# EAGLE board drvelocity (EAGLE 7.5.0)
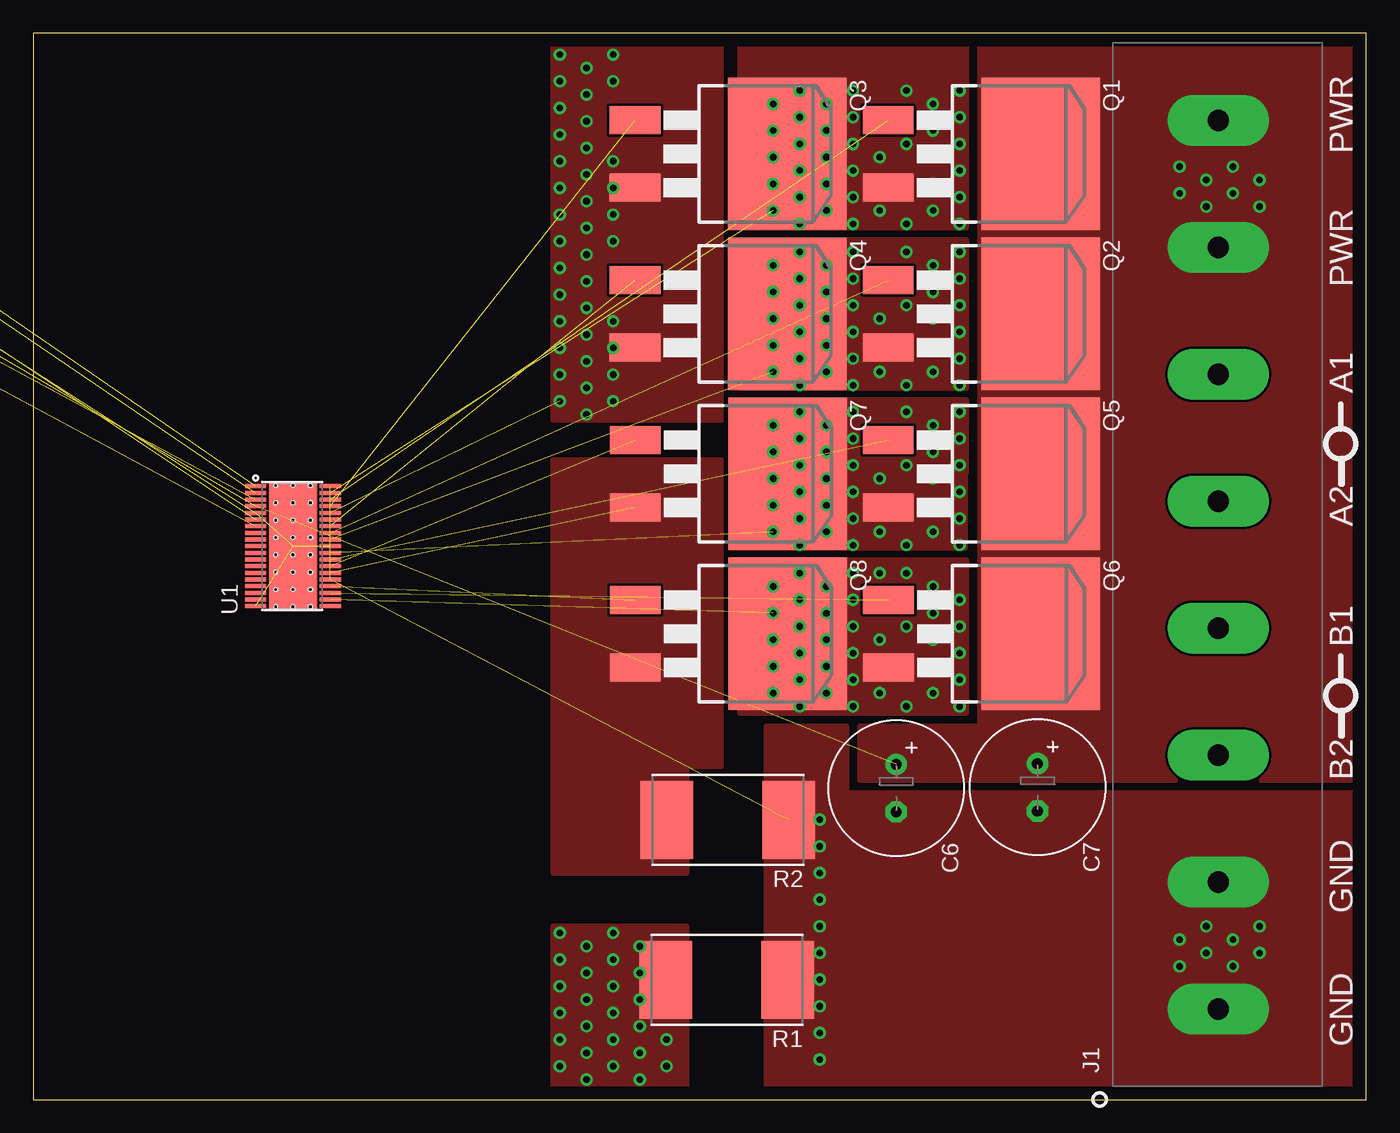
[diagram p0: board, top side]
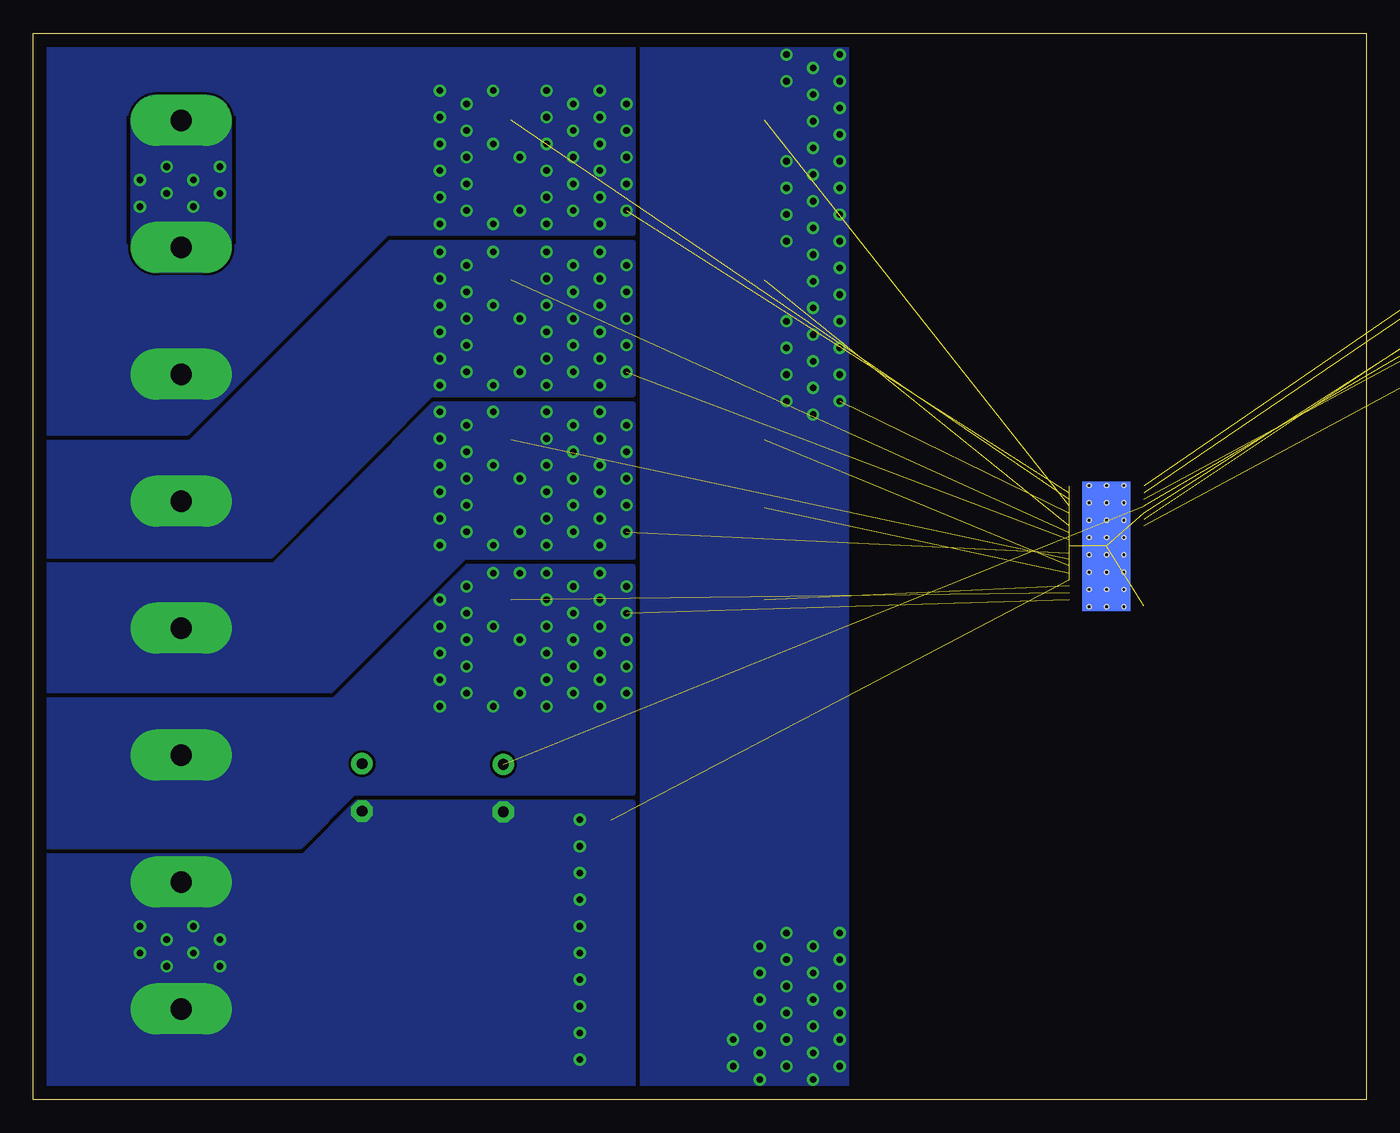
[diagram p1: board, bottom side, seen from below]

Size 100 x 80 mm. Coordinates in mm from the lower left corner, seen from the top.
Outline: 0,0 100,0 100,80 0,80 0,0
Copper layers (1*16): Top 0.035mm / dielectric 1.5mm / Bottom 0.035mm
Design rules "default *": minimum track width 10mil, minimum drill 0.5mm, track to track 8mil, track to pad 8mil, pad to pad 8mil, via to via 8mil, smd to smd 8mil, copper to edge 40mil, drill to drill 40mil, minimum pad ring 10mil, minimum via ring 8mil, stop-mask expansion 4mil, vias tented up to drill 0mil, thermal gap 10mil

## Footprints (pad centres in the part's own frame; a part is rotated, then mirrored left to right if it is on the bottom)
C0402 = smd 0.7 x 0.9: 1 -0.65,0; 2 0.65,0
E3,5-10 = drill 0.813 pad 1.6: + -1.778,0 | drill 0.813 pad 1.6 octagon: - 1.778,0
MOLEX_BARRIER_8 = drill 1.6 pad 3.81 long: 1 7.9,5.8; 2 7.9,15.325; 3 7.9,24.85; 4 7.9,34.375; 5 7.9,43.9; 6 7.9,53.425; 7 7.9,62.95; 8 7.9,72.475
D2PACK = smd 2.083 x 3.81: 1 -2.54,-8.89; 3 2.54,-8.89 | smd 11.43 x 8.89: 2 0,2.54
R4527 = smd 3.94 x 5.84: 1 -4.575,0; 2 4.575,0
HTSSOP-38 = smd 0.3 x 1.6: 1 9.15,-0.8; 2 8.65,-0.8; 3 8.15,-0.8; 4 7.65,-0.8; 5 7.15,-0.8; 6 6.65,-0.8; 7 6.15,-0.8; 8 5.65,-0.8; 9 5.15,-0.8; 10 4.65,-0.8; 11 4.15,-0.8; 12 3.65,-0.8; 13 3.15,-0.8; 14 2.65,-0.8; 15 2.15,-0.8; 16 1.65,-0.8; 17 1.15,-0.8; 18 0.65,-0.8; 19 0.15,-0.8; 20 0.15,-6.4; 21 0.65,-6.4; 22 1.15,-6.4; 23 1.65,-6.4; 24 2.15,-6.4; 25 2.65,-6.4; 26 3.15,-6.4; 27 3.65,-6.4; 28 4.15,-6.4; 29 4.65,-6.4; 30 5.15,-6.4; 31 5.65,-6.4; 32 6.15,-6.4; 33 6.65,-6.4; 34 7.15,-6.4; 35 7.65,-6.4; 36 8.15,-6.4; 37 8.65,-6.4; 38 9.15,-6.4 | smd 9.7 x 3.6: PPAD 4.65,-3.6 | hole 0.3: 0.1,-2.3; 0.1,-3.6; 0.1,-4.9; 1.4,-2.3; 1.4,-3.6; 1.4,-4.9; 2.7,-2.3; 2.7,-3.6; 2.7,-4.9; 4,-2.3; 4,-3.6; 4,-4.9; 5.3,-2.3; 5.3,-3.6; 5.3,-4.9; 6.6,-2.3; 6.6,-3.6; 6.6,-4.9; 7.9,-2.3; 7.9,-3.6; 7.9,-4.9; 9.2,-2.3; 9.2,-3.6; 9.2,-4.9
DIL28-3 = drill 0.813 long: 1 -16.51,-3.81; 2 -13.97,-3.81; 3 -11.43,-3.81; 4 -8.89,-3.81; 5 -6.35,-3.81; 6 -3.81,-3.81; 7 -1.27,-3.81; 8 1.27,-3.81; 9 3.81,-3.81; 10 6.35,-3.81; 11 8.89,-3.81; 12 11.43,-3.81; 13 13.97,-3.81; 14 16.51,-3.81; 15 16.51,3.81; 16 13.97,3.81; 17 11.43,3.81; 18 8.89,3.81; 19 6.35,3.81; 20 3.81,3.81; 21 1.27,3.81; 22 -1.27,3.81; 23 -3.81,3.81; 24 -6.35,3.81; 25 -8.89,3.81; 26 -11.43,3.81; 27 -13.97,3.81; 28 -16.51,3.81

## Placement (x,y rotation side)
C1  0.1  [C0402]  -27.94,76.2 0 top  (outside the outline)
C2  0.1  [C0402]  -33.02,76.2 0 top  (outside the outline)
C3  1  [C0402]  -41.91,76.2 0 top  (outside the outline)
C4  1  [C0402]  -45.72,76.2 0 top  (outside the outline)
C5  0.1  [C0402]  -38.1,76.2 0 top  (outside the outline)
C6  100  [E3,5-10]  64.74,23.36 270 top
C7  100  [E3,5-10]  75.34,23.42 270 top
J1  MOLEX_BARRIER_8  [MOLEX_BARRIER_8]  81,1 0 top
Q1  IRF3704S  [D2PACK]  73.03,70.95 270 top
Q2  IRF3704S  [D2PACK]  73.03,58.95 270 top
Q3  IRF3704S  [D2PACK]  54.03,70.95 270 top
Q4  IRF3704S  [D2PACK]  54.03,58.95 270 top
Q5  IRF3704S  [D2PACK]  73.03,46.95 270 top
Q6  IRF3704S  [D2PACK]  73.05,34.95 270 top
Q7  IRF3704S  [D2PACK]  54.05,46.95 270 top
Q8  IRF3704S  [D2PACK]  54.05,34.95 270 top
R1  1m  [R4527]  52.02,8.99 180 top
R2  1m  [R4527]  52.09,20.99 180 top
U1  DRV8704  [HTSSOP-38]  15.88,36.87 90 top
U2  ATMEGA168-20P  [DIL28-3]  -55,-7 0 top  (outside the outline)

## Library data of the parts
C1-C7 R1 R2 = resistor
J1 = Molex Barrier Terminal
Q1-Q8 = transistor-power
U1 = drv8704
U2 = adafruit

## Nets
A1HS: Q1.1 U1.36
A1LS: Q3.1 U1.35
A2HS: Q2.1 U1.31
A2LS: Q4.1 U1.32
AISENP: Q3.3 Q4.3 R1.2 U1.34
AOUT1: J1.6 Q1.3 Q3.2 U1.37
AOUT2: J1.5 Q2.3 Q4.2 U1.30
B1HS: Q5.1 U1.27
B1LS: Q7.1 U1.26
B2HS: Q6.1 U1.22
B2LS: Q8.1 U1.23
BISENP: Q7.3 Q8.3 R2.2 U1.25
BOUT1: J1.4 Q5.3 Q7.2 U1.28
BOUT2: J1.3 Q6.3 Q8.2 U1.21
GND: C2.1 C3.1 C4.1 C5.1 C6.- C7.- J1.1 J1.2 R1.1 R2.1 U1.5 U1.19 U1.24 U1.29 U1.33 U1.38 U1.PPAD
N$1: C1.2 U1.1
N$2: C1.1 U1.2
V5: C2.2 U1.6
VCP: C3.2 U1.3
VINT: C4.2 U1.7
VM: C5.2 C6.+ C7.+ J1.7 J1.8 Q1.2 Q2.2 Q5.2 Q6.2 U1.4

## Tracks (layer width: path | path; a pad name or v marks a point on that pad's centre or on a via)
A1HS  (1 unrouted)
A1LS  (1 unrouted)
A2HS  (1 unrouted)
A2LS  (1 unrouted)
AISENP  (via drill 0.5)  (1 unrouted)
  other vias: 39.5,12.5 39.5,10.5 39.5,8.5 39.5,6.5 39.5,4.5 39.5,2.5 41.5,11.5 41.5,9.5 41.5,7.5 41.5,5.5 41.5,3.5 41.5,1.5 43.5,12.5 43.5,10.5 43.5,8.5 43.5,6.5 43.5,4.5 43.5,2.5 45.5,11.5 45.5,9.5 45.5,7.5 45.5,5.5 45.5,3.5 45.5,1.5 47.5,4.5 47.5,2.5 39.5,78.4 39.5,76.4 39.5,74.4 39.5,72.4 39.5,70.4 39.5,68.4 39.5,66.4 39.5,54.4 39.5,64.4 39.5,56.4 39.5,62.4 39.5,58.4 39.5,60.4 39.5,52.4 41.5,77.4 41.5,75.4 41.5,73.4 41.5,71.4 41.5,69.4 41.5,67.4 41.5,65.4 41.5,53.4 41.5,63.4 41.5,55.4 41.5,61.4 41.5,57.4 41.5,59.4 41.5,51.4 43.5,58.4 43.5,56.4 43.5,54.4 43.5,52.4 43.5,70.4 43.5,68.4 43.5,66.4 43.5,64.4 43.5,76.4 43.5,78.4
  pour Top (no thermals): 49,13 49,-1 39,-1 39,13
  pour Top (no thermals): 39,51 51.6,51 51.6,81 39,81
  pour Bottom (no thermals): 39,81 54.3,81 54.3,-1 39,-1
AOUT1  (via drill 0.5)  (1 unrouted)
  other vias: 69.5,75.7 69.5,73.7 69.5,71.7 69.5,69.7 69.5,67.7 69.5,65.7 67.5,74.7 67.5,72.7 67.5,70.7 67.5,68.7 67.5,66.7 65.5,75.7 65.5,71.7 65.5,65.7 63.5,70.7 61.5,75.7 61.5,73.7 61.5,71.7 61.5,69.7 61.5,67.7 61.5,65.7 59.5,74.7 59.5,72.7 59.5,70.7 59.5,68.7 59.5,66.7 63.5,66.7 57.5,75.7 57.5,73.7 57.5,71.7 57.5,69.7 57.5,67.7 57.5,65.7 55.5,74.7 55.5,72.7 55.5,70.7 55.5,68.7 55.5,66.7
  pour Top (no thermals): 53,65.4 70,65.4 70,81 53,81
  pour Bottom (no thermals): 55,65 73.5,65 88.5,50 101,50 101,81 89,81 89,74 93.2,74 93.2,64 84.6,64 84.6,74 88,74 88,81 55,81
  pour Bottom (no thermals): 68,75 90,75 90,81 68,81
AOUT2  (via drill 0.5)  (1 unrouted)
  other vias: 69.5,63.6 69.5,61.6 69.5,59.6 69.5,57.6 69.5,55.6 69.5,53.6 67.5,62.6 67.5,60.6 67.5,58.6 67.5,56.6 67.5,54.6 65.5,63.6 65.5,59.6 65.5,53.6 63.5,58.6 61.5,63.6 61.5,61.6 61.5,59.6 61.5,57.6 61.5,55.6 61.5,53.6 59.5,62.6 59.5,60.6 59.5,58.6 59.5,56.6 59.5,54.6 63.5,54.6 57.5,63.6 57.5,61.6 57.5,59.6 57.5,57.6 57.5,55.6 57.5,53.6 55.5,62.6 55.5,60.6 55.5,58.6 55.5,56.6 55.5,54.6
  pour Top (no thermals): 53,53.4 70,53.4 70,64.5 53,64.5
  pour Bottom (no thermals): 55,52.9 70.2,52.9 82.2,40.8 101,40.8 101,49.3 88.2,49.3 73.2,64.3 55,64.3
B1HS  (1 unrouted)
B1LS  (1 unrouted)
B2HS  (1 unrouted)
B2LS  (1 unrouted)
BISENP  (1 unrouted)
  pour Top (no thermals): 49,17 49,25 51.6,25 51.6,48 39,48 39,17
BOUT1  (via drill 0.5)  (1 unrouted)
  other vias: 69.5,51.6 69.5,49.6 69.5,47.6 69.5,45.6 69.5,43.6 69.5,41.6 67.5,50.6 67.5,48.6 67.5,46.6 67.5,44.6 67.5,42.6 65.5,51.6 65.5,47.6 65.5,41.6 63.5,46.6 61.5,51.6 61.5,49.6 61.5,47.6 61.5,45.6 61.5,43.6 61.5,41.6 59.5,50.6 59.5,48.6 59.5,46.6 59.5,44.6 59.5,42.6 63.5,42.6 57.5,51.6 57.5,49.6 57.5,47.6 57.5,45.6 57.5,43.6 57.5,41.6 55.5,50.6 55.5,48.6 55.5,46.6 55.5,44.6 55.5,42.6
  pour Top (no thermals): 69.9,41.4 52.9,41.4 53,52.5 70,52.5
  pour Bottom (no thermals): 55,40.7 55,52.2 69.9,52.2 81.9,40.1 101,40.1 101,30.7 77.7,30.7 67.7,40.7
BOUT2  (via drill 0.5)  (1 unrouted)
  other vias: 63.5,39.5 69.5,37.5 69.5,35.5 69.5,33.5 69.5,31.5 69.5,29.5 67.5,38.5 67.5,36.5 67.5,34.5 67.5,32.5 67.5,30.5 65.5,39.5 65.5,35.5 65.5,29.5 63.5,34.5 61.5,39.5 61.5,37.5 61.5,35.5 61.5,33.5 61.5,31.5 61.5,29.5 59.5,38.5 59.5,36.5 59.5,34.5 59.5,32.5 59.5,30.5 63.5,30.5 57.5,39.5 57.5,37.5 57.5,35.5 57.5,33.5 57.5,31.5 57.5,29.5 55.5,38.5 55.5,36.5 55.5,34.5 55.5,32.5 55.5,30.5
  pour Top (no thermals): 53,29 70,29 70,40.5 53,40.5
  pour Bottom (no thermals): 101,30 77.4,30 67.4,40 55,40 55,23 76,23 80,19 101,19
GND  (via drill 0.5)  (11 unrouted)
  other vias: 59,21 59,19 59,17 59,15 59,13 59,11 59,9 59,7 59,5 59,3 92,13 92,11 90,10 90,12 88,13 88,11 86,10 86,12
  pour Top (no thermals): 101,-1 101,23 61,23 61,28 55,28 55,-1
  pour Bottom (no thermals): 101,-1 101,18.3 79.7,18.3 75.7,22.3 55,22.3 55,-1
N$1  (1 unrouted)
N$2  (1 unrouted)
V5  (1 unrouted)
VCP  (1 unrouted)
VINT  (1 unrouted)
VM  (via drill 0.5)  (2 unrouted)
  other vias: 92,67 92,69 90,70 90,68 88,67 88,69 86,70 86,68
  pour Top (no thermals): 101,81 71,81 71,28 62,28 62,24 101,24
  pour Bottom (no thermals): 87,75.2 91.1,75.2 arc-90 92.5,73 92.5,63.9 arc-90 90.8,62.2 87.1,62.2 arc-90 85.3,64 85.3,73.5 arc-90

## Text on the board
tNames: PWR | PWR | A1 | A2 | B1 | B2 | GND | GND